# Altium PCB Peak Detector With Banking.PcbDoc (part 5 of 5)
Units mil, origin at the board's own origin, x right, y up, seen from the top; angles counter-clockwise.
Board outline 3330 x 2725 mil, 4 copper layers (TopLayer, GROUND, MidLayer1, BottomLayer); 549 components, 391 nets, 1594 pads, 460 vias.
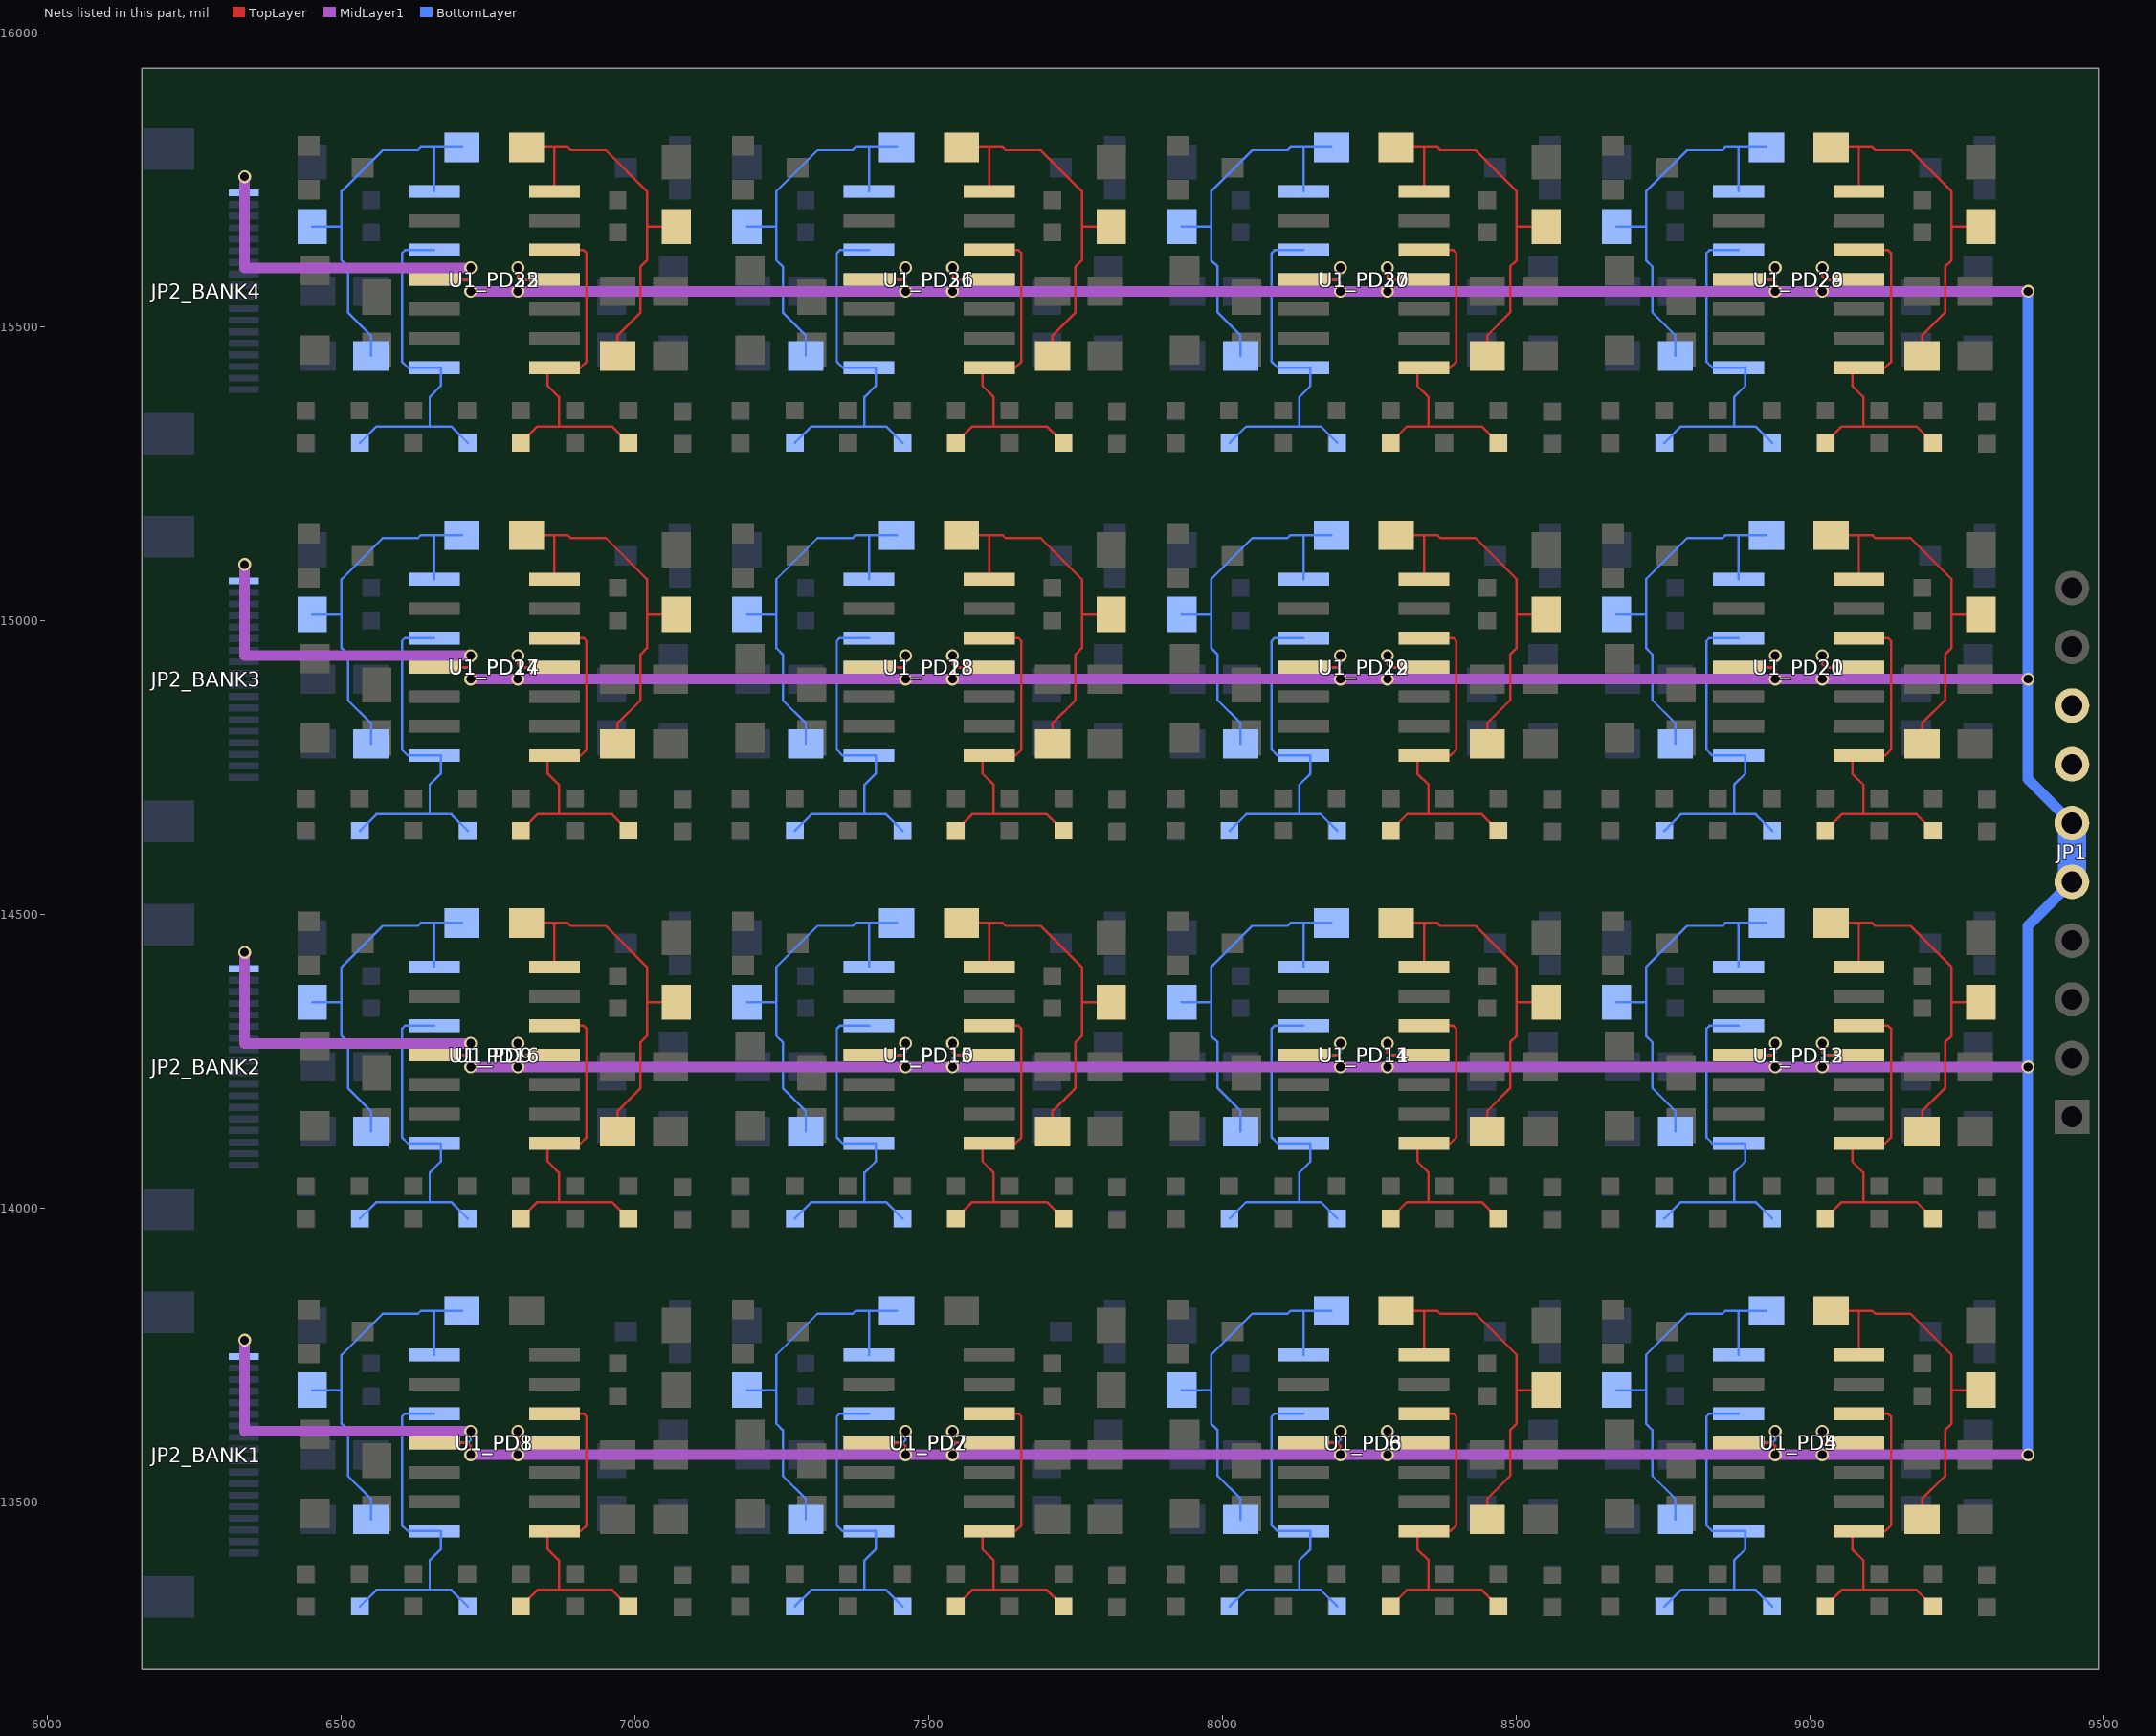
[diagram p7: the nets of this part, all layers, seen from the top]

## Via types
v1: diameter 22, hole 15, TopLayer to BottomLayer, 432 vias
v2: diameter 22, hole 16, TopLayer to BottomLayer, 28 vias

## Nets (pads, with @x,y where several pads share a name; then routed paths per layer and width w, separated by ;. In a path a pad name is that pad's centre, name@x,y a point inside that pad or via, vN(x,y) a via of type N, cw(c..) or ccw(c..) an arc to the next point about the centre after c; other vN are vias at no path point) (continued)
S_DIODE_PD3: C4_PD3.2 D1_PD3.1 D2_PD3.2 U1_PD3.7 | length 661.7
  TopLayer w4: D1_PD3.1@8295.01,13825 8342.35,13825 ; U1_PD3.7@8342.35,13750 8342.35,13825 ; C4_PD3.2@8449.99,13470 8449.99,13504.99 8489,13544 8489,13622 8500,13633 8500,13690 ; D2_PD3.2@8550,13690.01 8500.01,13690.01 ; 8342.35,13825 8365,13825 8370,13820 8430,13820 8500,13750 8500,13690.02
S_DIODE_PD4: C4_PD4.2 D1_PD4.1 D2_PD4.2 U1_PD4.7 | length 661.7
  TopLayer w4: D1_PD4.1@9035.01,13825 9082.35,13825 ; U1_PD4.7@9082.35,13750 9082.35,13825 ; C4_PD4.2@9189.99,13470 9189.99,13504.99 9229,13544 9229,13622 9240,13633 9240,13690 ; D2_PD4.2@9290,13690.01 9240.01,13690.01 ; 9082.35,13825 9105,13825 9110,13820 9170,13820 9240,13750 9240,13690.02
S_DIODE_PD5: C4_PD5.2 D1_PD5.1 D2_PD5.2 U1_PD5.7 | length 661.7
  BottomLayer w4: D2_PD5.2@8670,13690.01 8719.99,13690.01 ; C4_PD5.2@8770.01,13470 8770.01,13504.99 8731,13544 8731,13622 8720,13633 8720,13690 ; U1_PD5.7@8877.65,13750 8877.65,13825 ; D1_PD5.1@8924.99,13825 8877.65,13825 ; 8720,13690.02 8720,13750 8790,13820 8850,13820 8855,13825 8877.65,13825
S_DIODE_PD6: C4_PD6.2 D1_PD6.1 D2_PD6.2 U1_PD6.7 | length 661.7
  BottomLayer w4: D2_PD6.2@7930,13690.01 7979.99,13690.01 ; C4_PD6.2@8030.01,13470 8030.01,13504.99 7991,13544 7991,13622 7980,13633 7980,13690 ; U1_PD6.7@8137.65,13750 8137.65,13825 ; D1_PD6.1@8184.99,13825 8137.65,13825 ; 7980,13690.02 7980,13750 8050,13820 8110,13820 8115,13825 8137.65,13825
S_DIODE_PD7: C4_PD7.2 D1_PD7.1 D2_PD7.2 U1_PD7.7 | length 661.7
  BottomLayer w4: D2_PD7.2@7190,13690.01 7239.99,13690.01 ; C4_PD7.2@7290.01,13470 7290.01,13504.99 7251,13544 7251,13622 7240,13633 7240,13690 ; U1_PD7.7@7397.65,13750 7397.65,13825 ; D1_PD7.1@7444.99,13825 7397.65,13825 ; 7240,13690.02 7240,13750 7310,13820 7370,13820 7375,13825 7397.65,13825
S_DIODE_PD8: C4_PD8.2 D1_PD8.1 D2_PD8.2 U1_PD8.7 | length 661.7
  BottomLayer w4: D2_PD8.2@6450,13690.01 6499.99,13690.01 ; C4_PD8.2@6550.01,13470 6550.01,13504.99 6511,13544 6511,13622 6500,13633 6500,13690 ; U1_PD8.7@6657.65,13750 6657.65,13825 ; D1_PD8.1@6704.99,13825 6657.65,13825 ; 6500,13690.02 6500,13750 6570,13820 6630,13820 6635,13825 6657.65,13825
S_DIODE_PD9: C4_PD9.2 D1_PD9.1 D2_PD9.2 U1_PD9.7 | length 661.7
  TopLayer w4: D1_PD9.1@6815.01,14485 6862.35,14485 ; U1_PD9.7@6862.35,14410 6862.35,14485 ; C4_PD9.2@6969.99,14130 6969.99,14164.99 7009,14204 7009,14282 7020,14293 7020,14350 ; D2_PD9.2@7070,14350.01 7020.01,14350.01 ; 6862.35,14485 6885,14485 6890,14480 6950,14480 7020,14410 7020,14350.02
S_DIODE_PD10: C4_PD10.2 D1_PD10.1 D2_PD10.2 U1_PD10.7 | length 661.7
  TopLayer w4: D1_PD10.1@7555.01,14485 7602.35,14485 ; U1_PD10.7@7602.35,14410 7602.35,14485 ; C4_PD10.2@7709.99,14130 7709.99,14164.99 7749,14204 7749,14282 7760,14293 7760,14350 ; D2_PD10.2@7810,14350.01 7760.01,14350.01 ; 7602.35,14485 7625,14485 7630,14480 7690,14480 7760,14410 7760,14350.02
S_DIODE_PD11: C4_PD11.2 D1_PD11.1 D2_PD11.2 U1_PD11.7 | length 661.7
  TopLayer w4: D1_PD11.1@8295.01,14485 8342.35,14485 ; U1_PD11.7@8342.35,14410 8342.35,14485 ; C4_PD11.2@8449.99,14130 8449.99,14164.99 8489,14204 8489,14282 8500,14293 8500,14350 ; D2_PD11.2@8550,14350.01 8500.01,14350.01 ; 8342.35,14485 8365,14485 8370,14480 8430,14480 8500,14410 8500,14350.02
S_DIODE_PD12: C4_PD12.2 D1_PD12.1 D2_PD12.2 U1_PD12.7 | length 661.7
  TopLayer w4: D1_PD12.1@9035.01,14485 9082.35,14485 ; U1_PD12.7@9082.35,14410 9082.35,14485 ; C4_PD12.2@9189.99,14130 9189.99,14164.99 9229,14204 9229,14282 9240,14293 9240,14350 ; D2_PD12.2@9290,14350.01 9240.01,14350.01 ; 9082.35,14485 9105,14485 9110,14480 9170,14480 9240,14410 9240,14350.02
S_DIODE_PD13: C4_PD13.2 D1_PD13.1 D2_PD13.2 U1_PD13.7 | length 661.7
  BottomLayer w4: D2_PD13.2@8670,14350.01 8719.99,14350.01 ; C4_PD13.2@8770.01,14130 8770.01,14164.99 8731,14204 8731,14282 8720,14293 8720,14350 ; U1_PD13.7@8877.65,14410 8877.65,14485 ; D1_PD13.1@8924.99,14485 8877.65,14485 ; 8720,14350.02 8720,14410 8790,14480 8850,14480 8855,14485 8877.65,14485
S_DIODE_PD14: C4_PD14.2 D1_PD14.1 D2_PD14.2 U1_PD14.7 | length 661.7
  BottomLayer w4: D2_PD14.2@7930,14350.01 7979.99,14350.01 ; C4_PD14.2@8030.01,14130 8030.01,14164.99 7991,14204 7991,14282 7980,14293 7980,14350 ; U1_PD14.7@8137.65,14410 8137.65,14485 ; D1_PD14.1@8184.99,14485 8137.65,14485 ; 7980,14350.02 7980,14410 8050,14480 8110,14480 8115,14485 8137.65,14485
S_DIODE_PD15: C4_PD15.2 D1_PD15.1 D2_PD15.2 U1_PD15.7 | length 661.7
  BottomLayer w4: D2_PD15.2@7190,14350.01 7239.99,14350.01 ; C4_PD15.2@7290.01,14130 7290.01,14164.99 7251,14204 7251,14282 7240,14293 7240,14350 ; U1_PD15.7@7397.65,14410 7397.65,14485 ; D1_PD15.1@7444.99,14485 7397.65,14485 ; 7240,14350.02 7240,14410 7310,14480 7370,14480 7375,14485 7397.65,14485
S_DIODE_PD16: C4_PD16.2 D1_PD16.1 D2_PD16.2 U1_PD16.7 | length 661.7
  BottomLayer w4: D2_PD16.2@6450,14350.01 6499.99,14350.01 ; C4_PD16.2@6550.01,14130 6550.01,14164.99 6511,14204 6511,14282 6500,14293 6500,14350 ; U1_PD16.7@6657.65,14410 6657.65,14485 ; D1_PD16.1@6704.99,14485 6657.65,14485 ; 6500,14350.02 6500,14410 6570,14480 6630,14480 6635,14485 6657.65,14485
S_DIODE_PD17: C4_PD17.2 D1_PD17.1 D2_PD17.2 U1_PD17.7 | length 661.7
  TopLayer w4: D1_PD17.1@6815.01,15145 6862.35,15145 ; U1_PD17.7@6862.35,15070 6862.35,15145 ; C4_PD17.2@6969.99,14790 6969.99,14824.99 7009,14864 7009,14942 7020,14953 7020,15010 ; D2_PD17.2@7070,15010.01 7020.01,15010.01 ; 6862.35,15145 6885,15145 6890,15140 6950,15140 7020,15070 7020,15010.02
S_DIODE_PD18: C4_PD18.2 D1_PD18.1 D2_PD18.2 U1_PD18.7 | length 661.7
  TopLayer w4: D1_PD18.1@7555.01,15145 7602.35,15145 ; U1_PD18.7@7602.35,15070 7602.35,15145 ; C4_PD18.2@7709.99,14790 7709.99,14824.99 7749,14864 7749,14942 7760,14953 7760,15010 ; D2_PD18.2@7810,15010.01 7760.01,15010.01 ; 7602.35,15145 7625,15145 7630,15140 7690,15140 7760,15070 7760,15010.02
S_DIODE_PD19: C4_PD19.2 D1_PD19.1 D2_PD19.2 U1_PD19.7 | length 661.7
  TopLayer w4: D1_PD19.1@8295.01,15145 8342.35,15145 ; U1_PD19.7@8342.35,15070 8342.35,15145 ; C4_PD19.2@8449.99,14790 8449.99,14824.99 8489,14864 8489,14942 8500,14953 8500,15010 ; D2_PD19.2@8550,15010.01 8500.01,15010.01 ; 8342.35,15145 8365,15145 8370,15140 8430,15140 8500,15070 8500,15010.02
S_DIODE_PD20: C4_PD20.2 D1_PD20.1 D2_PD20.2 U1_PD20.7 | length 661.7
  TopLayer w4: D1_PD20.1@9035.01,15145 9082.35,15145 ; U1_PD20.7@9082.35,15070 9082.35,15145 ; C4_PD20.2@9189.99,14790 9189.99,14824.99 9229,14864 9229,14942 9240,14953 9240,15010 ; D2_PD20.2@9290,15010.01 9240.01,15010.01 ; 9082.35,15145 9105,15145 9110,15140 9170,15140 9240,15070 9240,15010.02
S_DIODE_PD21: C4_PD21.2 D1_PD21.1 D2_PD21.2 U1_PD21.7 | length 661.7
  BottomLayer w4: D2_PD21.2@8670,15010.01 8719.99,15010.01 ; C4_PD21.2@8770.01,14790 8770.01,14824.99 8731,14864 8731,14942 8720,14953 8720,15010 ; U1_PD21.7@8877.65,15070 8877.65,15145 ; D1_PD21.1@8924.99,15145 8877.65,15145 ; 8720,15010.02 8720,15070 8790,15140 8850,15140 8855,15145 8877.65,15145
S_DIODE_PD22: C4_PD22.2 D1_PD22.1 D2_PD22.2 U1_PD22.7 | length 661.7
  BottomLayer w4: D2_PD22.2@7930,15010.01 7979.99,15010.01 ; C4_PD22.2@8030.01,14790 8030.01,14824.99 7991,14864 7991,14942 7980,14953 7980,15010 ; U1_PD22.7@8137.65,15070 8137.65,15145 ; D1_PD22.1@8184.99,15145 8137.65,15145 ; 7980,15010.02 7980,15070 8050,15140 8110,15140 8115,15145 8137.65,15145
S_DIODE_PD23: C4_PD23.2 D1_PD23.1 D2_PD23.2 U1_PD23.7 | length 661.7
  BottomLayer w4: D2_PD23.2@7190,15010.01 7239.99,15010.01 ; C4_PD23.2@7290.01,14790 7290.01,14824.99 7251,14864 7251,14942 7240,14953 7240,15010 ; U1_PD23.7@7397.65,15070 7397.65,15145 ; D1_PD23.1@7444.99,15145 7397.65,15145 ; 7240,15010.02 7240,15070 7310,15140 7370,15140 7375,15145 7397.65,15145
S_DIODE_PD24: C4_PD24.2 D1_PD24.1 D2_PD24.2 U1_PD24.7 | length 661.7
  BottomLayer w4: D2_PD24.2@6450,15010.01 6499.99,15010.01 ; C4_PD24.2@6550.01,14790 6550.01,14824.99 6511,14864 6511,14942 6500,14953 6500,15010 ; U1_PD24.7@6657.65,15070 6657.65,15145 ; D1_PD24.1@6704.99,15145 6657.65,15145 ; 6500,15010.02 6500,15070 6570,15140 6630,15140 6635,15145 6657.65,15145
S_DIODE_PD25: C4_PD25.2 D1_PD25.1 D2_PD25.2 U1_PD25.7 | length 661.7
  TopLayer w4: D1_PD25.1@6815.01,15805 6862.35,15805 ; U1_PD25.7@6862.35,15730 6862.35,15805 ; C4_PD25.2@6969.99,15450 6969.99,15484.99 7009,15524 7009,15602 7020,15613 7020,15670 ; D2_PD25.2@7070,15670.01 7020.01,15670.01 ; 6862.35,15805 6885,15805 6890,15800 6950,15800 7020,15730 7020,15670.02
S_DIODE_PD26: C4_PD26.2 D1_PD26.1 D2_PD26.2 U1_PD26.7 | length 661.7
  TopLayer w4: D1_PD26.1@7555.01,15805 7602.35,15805 ; U1_PD26.7@7602.35,15730 7602.35,15805 ; C4_PD26.2@7709.99,15450 7709.99,15484.99 7749,15524 7749,15602 7760,15613 7760,15670 ; D2_PD26.2@7810,15670.01 7760.01,15670.01 ; 7602.35,15805 7625,15805 7630,15800 7690,15800 7760,15730 7760,15670.02
S_DIODE_PD27: C4_PD27.2 D1_PD27.1 D2_PD27.2 U1_PD27.7 | length 661.7
  TopLayer w4: D1_PD27.1@8295.01,15805 8342.35,15805 ; U1_PD27.7@8342.35,15730 8342.35,15805 ; C4_PD27.2@8449.99,15450 8449.99,15484.99 8489,15524 8489,15602 8500,15613 8500,15670 ; D2_PD27.2@8550,15670.01 8500.01,15670.01 ; 8342.35,15805 8365,15805 8370,15800 8430,15800 8500,15730 8500,15670.02
S_DIODE_PD28: C4_PD28.2 D1_PD28.1 D2_PD28.2 U1_PD28.7 | length 661.7
  TopLayer w4: D1_PD28.1@9035.01,15805 9082.35,15805 ; U1_PD28.7@9082.35,15730 9082.35,15805 ; C4_PD28.2@9189.99,15450 9189.99,15484.99 9229,15524 9229,15602 9240,15613 9240,15670 ; D2_PD28.2@9290,15670.01 9240.01,15670.01 ; 9082.35,15805 9105,15805 9110,15800 9170,15800 9240,15730 9240,15670.02
S_DIODE_PD29: C4_PD29.2 D1_PD29.1 D2_PD29.2 U1_PD29.7 | length 661.7
  BottomLayer w4: D2_PD29.2@8670,15670.01 8719.99,15670.01 ; C4_PD29.2@8770.01,15450 8770.01,15484.99 8731,15524 8731,15602 8720,15613 8720,15670 ; U1_PD29.7@8877.65,15730 8877.65,15805 ; D1_PD29.1@8924.99,15805 8877.65,15805 ; 8720,15670.02 8720,15730 8790,15800 8850,15800 8855,15805 8877.65,15805
S_DIODE_PD30: C4_PD30.2 D1_PD30.1 D2_PD30.2 U1_PD30.7 | length 661.7
  BottomLayer w4: D2_PD30.2@7930,15670.01 7979.99,15670.01 ; C4_PD30.2@8030.01,15450 8030.01,15484.99 7991,15524 7991,15602 7980,15613 7980,15670 ; U1_PD30.7@8137.65,15730 8137.65,15805 ; D1_PD30.1@8184.99,15805 8137.65,15805 ; 7980,15670.02 7980,15730 8050,15800 8110,15800 8115,15805 8137.65,15805
S_DIODE_PD31: C4_PD31.2 D1_PD31.1 D2_PD31.2 U1_PD31.7 | length 661.7
  BottomLayer w4: D2_PD31.2@7190,15670.01 7239.99,15670.01 ; C4_PD31.2@7290.01,15450 7290.01,15484.99 7251,15524 7251,15602 7240,15613 7240,15670 ; U1_PD31.7@7397.65,15730 7397.65,15805 ; D1_PD31.1@7444.99,15805 7397.65,15805 ; 7240,15670.02 7240,15730 7310,15800 7370,15800 7375,15805 7397.65,15805
S_DIODE_PD32: C4_PD32.2 D1_PD32.1 D2_PD32.2 U1_PD32.7 | length 661.7
  BottomLayer w4: D2_PD32.2@6450,15670.01 6499.99,15670.01 ; C4_PD32.2@6550.01,15450 6550.01,15484.99 6511,15524 6511,15602 6500,15613 6500,15670 ; U1_PD32.7@6657.65,15730 6657.65,15805 ; D1_PD32.1@6704.99,15805 6657.65,15805 ; 6500,15670.02 6500,15730 6570,15800 6630,15800 6635,15805 6657.65,15805
TRACKING_PD1: R6_PD1.1 RPOT_PD1.2 U1_PD1.1 U1_PD1.5 | length 625.1
  TopLayer w4: RPOT_PD1.2@6805.29,13321.99 6833.3,13350 6850,13350 ; 6851,13350 6870,13350 ; U1_PD1.5@6862.35,13650 6912,13650 6917,13645 6917,13460 6907,13450 U1_PD1.1@6862.35,13450 6851,13450 6851,13419 6870,13400 6870,13350 ; R6_PD1.1@6988.43,13322 6960.43,13350 6870,13350
TRACKING_PD2: R6_PD2.1 RPOT_PD2.2 U1_PD2.1 U1_PD2.5 | length 625.1
  TopLayer w4: RPOT_PD2.2@7545.29,13321.99 7573.3,13350 7590,13350 ; 7591,13350 7610,13350 ; U1_PD2.5@7602.35,13650 7652,13650 7657,13645 7657,13460 7647,13450 U1_PD2.1@7602.35,13450 7591,13450 7591,13419 7610,13400 7610,13350 ; R6_PD2.1@7728.43,13322 7700.43,13350 7610,13350
TRACKING_PD3: R6_PD3.1 RPOT_PD3.2 U1_PD3.1 U1_PD3.5 | length 625.1
  TopLayer w4: RPOT_PD3.2@8285.29,13321.99 8313.3,13350 8330,13350 ; 8331,13350 8350,13350 ; U1_PD3.5@8342.35,13650 8392,13650 8397,13645 8397,13460 8387,13450 U1_PD3.1@8342.35,13450 8331,13450 8331,13419 8350,13400 8350,13350 ; R6_PD3.1@8468.43,13322 8440.43,13350 8350,13350
TRACKING_PD4: R6_PD4.1 RPOT_PD4.2 U1_PD4.1 U1_PD4.5 | length 625.1
  TopLayer w4: RPOT_PD4.2@9025.29,13321.99 9053.3,13350 9070,13350 ; 9071,13350 9090,13350 ; U1_PD4.5@9082.35,13650 9132,13650 9137,13645 9137,13460 9127,13450 U1_PD4.1@9082.35,13450 9071,13450 9071,13419 9090,13400 9090,13350 ; R6_PD4.1@9208.43,13322 9180.43,13350 9090,13350
TRACKING_PD5: R6_PD5.1 RPOT_PD5.2 U1_PD5.1 U1_PD5.5 | length 625.1
  BottomLayer w4: R6_PD5.1@8751.57,13322 8779.57,13350 8870,13350 ; U1_PD5.5@8877.65,13650 8828,13650 8823,13645 8823,13460 8833,13450 U1_PD5.1@8877.65,13450 8889,13450 8889,13419 8870,13400 8870,13350 ; 8889,13350 8870,13350 ; 8890,13350 8906.7,13350 RPOT_PD5.2@8934.71,13321.99
TRACKING_PD6: R6_PD6.1 RPOT_PD6.2 U1_PD6.1 U1_PD6.5 | length 625.1
  BottomLayer w4: R6_PD6.1@8011.57,13322 8039.57,13350 8130,13350 ; U1_PD6.5@8137.65,13650 8088,13650 8083,13645 8083,13460 8093,13450 U1_PD6.1@8137.65,13450 8149,13450 8149,13419 8130,13400 8130,13350 ; 8149,13350 8130,13350 ; 8150,13350 8166.7,13350 RPOT_PD6.2@8194.71,13321.99
TRACKING_PD7: R6_PD7.1 RPOT_PD7.2 U1_PD7.1 U1_PD7.5 | length 625.1
  BottomLayer w4: R6_PD7.1@7271.57,13322 7299.57,13350 7390,13350 ; U1_PD7.5@7397.65,13650 7348,13650 7343,13645 7343,13460 7353,13450 U1_PD7.1@7397.65,13450 7409,13450 7409,13419 7390,13400 7390,13350 ; 7409,13350 7390,13350 ; 7410,13350 7426.7,13350 RPOT_PD7.2@7454.71,13321.99
TRACKING_PD8: R6_PD8.1 RPOT_PD8.2 U1_PD8.1 U1_PD8.5 | length 625.1
  BottomLayer w4: R6_PD8.1@6531.57,13322 6559.57,13350 6650,13350 ; U1_PD8.5@6657.65,13650 6608,13650 6603,13645 6603,13460 6613,13450 U1_PD8.1@6657.65,13450 6669,13450 6669,13419 6650,13400 6650,13350 ; 6669,13350 6650,13350 ; 6670,13350 6686.7,13350 RPOT_PD8.2@6714.71,13321.99
TRACKING_PD9: R6_PD9.1 RPOT_PD9.2 U1_PD9.1 U1_PD9.5 | length 625.1
  TopLayer w4: RPOT_PD9.2@6805.29,13981.99 6833.3,14010 6850,14010 ; 6851,14010 6870,14010 ; U1_PD9.5@6862.35,14310 6912,14310 6917,14305 6917,14120 6907,14110 U1_PD9.1@6862.35,14110 6851,14110 6851,14079 6870,14060 6870,14010 ; R6_PD9.1@6988.43,13982 6960.43,14010 6870,14010
TRACKING_PD10: R6_PD10.1 RPOT_PD10.2 U1_PD10.1 U1_PD10.5 | length 625.1
  TopLayer w4: RPOT_PD10.2@7545.29,13981.99 7573.3,14010 7590,14010 ; 7591,14010 7610,14010 ; U1_PD10.5@7602.35,14310 7652,14310 7657,14305 7657,14120 7647,14110 U1_PD10.1@7602.35,14110 7591,14110 7591,14079 7610,14060 7610,14010 ; R6_PD10.1@7728.43,13982 7700.43,14010 7610,14010
TRACKING_PD11: R6_PD11.1 RPOT_PD11.2 U1_PD11.1 U1_PD11.5 | length 625.1
  TopLayer w4: RPOT_PD11.2@8285.29,13981.99 8313.3,14010 8330,14010 ; 8331,14010 8350,14010 ; U1_PD11.5@8342.35,14310 8392,14310 8397,14305 8397,14120 8387,14110 U1_PD11.1@8342.35,14110 8331,14110 8331,14079 8350,14060 8350,14010 ; R6_PD11.1@8468.43,13982 8440.43,14010 8350,14010
TRACKING_PD12: R6_PD12.1 RPOT_PD12.2 U1_PD12.1 U1_PD12.5 | length 625.1
  TopLayer w4: RPOT_PD12.2@9025.29,13981.99 9053.3,14010 9070,14010 ; 9071,14010 9090,14010 ; U1_PD12.5@9082.35,14310 9132,14310 9137,14305 9137,14120 9127,14110 U1_PD12.1@9082.35,14110 9071,14110 9071,14079 9090,14060 9090,14010 ; R6_PD12.1@9208.43,13982 9180.43,14010 9090,14010
TRACKING_PD13: R6_PD13.1 RPOT_PD13.2 U1_PD13.1 U1_PD13.5 | length 625.1
  BottomLayer w4: R6_PD13.1@8751.57,13982 8779.57,14010 8870,14010 ; U1_PD13.5@8877.65,14310 8828,14310 8823,14305 8823,14120 8833,14110 U1_PD13.1@8877.65,14110 8889,14110 8889,14079 8870,14060 8870,14010 ; 8889,14010 8870,14010 ; 8890,14010 8906.7,14010 RPOT_PD13.2@8934.71,13981.99
TRACKING_PD14: R6_PD14.1 RPOT_PD14.2 U1_PD14.1 U1_PD14.5 | length 625.1
  BottomLayer w4: R6_PD14.1@8011.57,13982 8039.57,14010 8130,14010 ; U1_PD14.5@8137.65,14310 8088,14310 8083,14305 8083,14120 8093,14110 U1_PD14.1@8137.65,14110 8149,14110 8149,14079 8130,14060 8130,14010 ; 8149,14010 8130,14010 ; 8150,14010 8166.7,14010 RPOT_PD14.2@8194.71,13981.99
TRACKING_PD15: R6_PD15.1 RPOT_PD15.2 U1_PD15.1 U1_PD15.5 | length 625.1
  BottomLayer w4: R6_PD15.1@7271.57,13982 7299.57,14010 7390,14010 ; U1_PD15.5@7397.65,14310 7348,14310 7343,14305 7343,14120 7353,14110 U1_PD15.1@7397.65,14110 7409,14110 7409,14079 7390,14060 7390,14010 ; 7409,14010 7390,14010 ; 7410,14010 7426.7,14010 RPOT_PD15.2@7454.71,13981.99
TRACKING_PD16: R6_PD16.1 RPOT_PD16.2 U1_PD16.1 U1_PD16.5 | length 625.1
  BottomLayer w4: R6_PD16.1@6531.57,13982 6559.57,14010 6650,14010 ; U1_PD16.5@6657.65,14310 6608,14310 6603,14305 6603,14120 6613,14110 U1_PD16.1@6657.65,14110 6669,14110 6669,14079 6650,14060 6650,14010 ; 6669,14010 6650,14010 ; 6670,14010 6686.7,14010 RPOT_PD16.2@6714.71,13981.99
TRACKING_PD17: R6_PD17.1 RPOT_PD17.2 U1_PD17.1 U1_PD17.5 | length 625.1
  TopLayer w4: RPOT_PD17.2@6805.29,14641.99 6833.3,14670 6850,14670 ; 6851,14670 6870,14670 ; U1_PD17.5@6862.35,14970 6912,14970 6917,14965 6917,14780 6907,14770 U1_PD17.1@6862.35,14770 6851,14770 6851,14739 6870,14720 6870,14670 ; R6_PD17.1@6988.43,14642 6960.43,14670 6870,14670
TRACKING_PD18: R6_PD18.1 RPOT_PD18.2 U1_PD18.1 U1_PD18.5 | length 625.1
  TopLayer w4: RPOT_PD18.2@7545.29,14641.99 7573.3,14670 7590,14670 ; 7591,14670 7610,14670 ; U1_PD18.5@7602.35,14970 7652,14970 7657,14965 7657,14780 7647,14770 U1_PD18.1@7602.35,14770 7591,14770 7591,14739 7610,14720 7610,14670 ; R6_PD18.1@7728.43,14642 7700.43,14670 7610,14670
TRACKING_PD19: R6_PD19.1 RPOT_PD19.2 U1_PD19.1 U1_PD19.5 | length 625.1
  TopLayer w4: RPOT_PD19.2@8285.29,14641.99 8313.3,14670 8330,14670 ; 8331,14670 8350,14670 ; U1_PD19.5@8342.35,14970 8392,14970 8397,14965 8397,14780 8387,14770 U1_PD19.1@8342.35,14770 8331,14770 8331,14739 8350,14720 8350,14670 ; R6_PD19.1@8468.43,14642 8440.43,14670 8350,14670
TRACKING_PD20: R6_PD20.1 RPOT_PD20.2 U1_PD20.1 U1_PD20.5 | length 625.1
  TopLayer w4: RPOT_PD20.2@9025.29,14641.99 9053.3,14670 9070,14670 ; 9071,14670 9090,14670 ; U1_PD20.5@9082.35,14970 9132,14970 9137,14965 9137,14780 9127,14770 U1_PD20.1@9082.35,14770 9071,14770 9071,14739 9090,14720 9090,14670 ; R6_PD20.1@9208.43,14642 9180.43,14670 9090,14670
TRACKING_PD21: R6_PD21.1 RPOT_PD21.2 U1_PD21.1 U1_PD21.5 | length 625.1
  BottomLayer w4: R6_PD21.1@8751.57,14642 8779.57,14670 8870,14670 ; U1_PD21.5@8877.65,14970 8828,14970 8823,14965 8823,14780 8833,14770 U1_PD21.1@8877.65,14770 8889,14770 8889,14739 8870,14720 8870,14670 ; 8889,14670 8870,14670 ; 8890,14670 8906.7,14670 RPOT_PD21.2@8934.71,14641.99
TRACKING_PD22: R6_PD22.1 RPOT_PD22.2 U1_PD22.1 U1_PD22.5 | length 625.1
  BottomLayer w4: R6_PD22.1@8011.57,14642 8039.57,14670 8130,14670 ; U1_PD22.5@8137.65,14970 8088,14970 8083,14965 8083,14780 8093,14770 U1_PD22.1@8137.65,14770 8149,14770 8149,14739 8130,14720 8130,14670 ; 8149,14670 8130,14670 ; 8150,14670 8166.7,14670 RPOT_PD22.2@8194.71,14641.99
TRACKING_PD23: R6_PD23.1 RPOT_PD23.2 U1_PD23.1 U1_PD23.5 | length 625.1
  BottomLayer w4: R6_PD23.1@7271.57,14642 7299.57,14670 7390,14670 ; U1_PD23.5@7397.65,14970 7348,14970 7343,14965 7343,14780 7353,14770 U1_PD23.1@7397.65,14770 7409,14770 7409,14739 7390,14720 7390,14670 ; 7409,14670 7390,14670 ; 7410,14670 7426.7,14670 RPOT_PD23.2@7454.71,14641.99
TRACKING_PD24: R6_PD24.1 RPOT_PD24.2 U1_PD24.1 U1_PD24.5 | length 625.1
  BottomLayer w4: R6_PD24.1@6531.57,14642 6559.57,14670 6650,14670 ; U1_PD24.5@6657.65,14970 6608,14970 6603,14965 6603,14780 6613,14770 U1_PD24.1@6657.65,14770 6669,14770 6669,14739 6650,14720 6650,14670 ; 6669,14670 6650,14670 ; 6670,14670 6686.7,14670 RPOT_PD24.2@6714.71,14641.99
TRACKING_PD25: R6_PD25.1 RPOT_PD25.2 U1_PD25.1 U1_PD25.5 | length 625.1
  TopLayer w4: RPOT_PD25.2@6805.29,15301.99 6833.3,15330 6850,15330 ; 6851,15330 6870,15330 ; U1_PD25.5@6862.35,15630 6912,15630 6917,15625 6917,15440 6907,15430 U1_PD25.1@6862.35,15430 6851,15430 6851,15399 6870,15380 6870,15330 ; R6_PD25.1@6988.43,15302 6960.43,15330 6870,15330
TRACKING_PD26: R6_PD26.1 RPOT_PD26.2 U1_PD26.1 U1_PD26.5 | length 625.1
  TopLayer w4: RPOT_PD26.2@7545.29,15301.99 7573.3,15330 7590,15330 ; 7591,15330 7610,15330 ; U1_PD26.5@7602.35,15630 7652,15630 7657,15625 7657,15440 7647,15430 U1_PD26.1@7602.35,15430 7591,15430 7591,15399 7610,15380 7610,15330 ; R6_PD26.1@7728.43,15302 7700.43,15330 7610,15330
TRACKING_PD27: R6_PD27.1 RPOT_PD27.2 U1_PD27.1 U1_PD27.5 | length 625.1
  TopLayer w4: RPOT_PD27.2@8285.29,15301.99 8313.3,15330 8330,15330 ; 8331,15330 8350,15330 ; U1_PD27.5@8342.35,15630 8392,15630 8397,15625 8397,15440 8387,15430 U1_PD27.1@8342.35,15430 8331,15430 8331,15399 8350,15380 8350,15330 ; R6_PD27.1@8468.43,15302 8440.43,15330 8350,15330
TRACKING_PD28: R6_PD28.1 RPOT_PD28.2 U1_PD28.1 U1_PD28.5 | length 625.1
  TopLayer w4: RPOT_PD28.2@9025.29,15301.99 9053.3,15330 9070,15330 ; 9071,15330 9090,15330 ; U1_PD28.5@9082.35,15630 9132,15630 9137,15625 9137,15440 9127,15430 U1_PD28.1@9082.35,15430 9071,15430 9071,15399 9090,15380 9090,15330 ; R6_PD28.1@9208.43,15302 9180.43,15330 9090,15330
TRACKING_PD29: R6_PD29.1 RPOT_PD29.2 U1_PD29.1 U1_PD29.5 | length 625.1
  BottomLayer w4: R6_PD29.1@8751.57,15302 8779.57,15330 8870,15330 ; U1_PD29.5@8877.65,15630 8828,15630 8823,15625 8823,15440 8833,15430 U1_PD29.1@8877.65,15430 8889,15430 8889,15399 8870,15380 8870,15330 ; 8889,15330 8870,15330 ; 8890,15330 8906.7,15330 RPOT_PD29.2@8934.71,15301.99
TRACKING_PD30: R6_PD30.1 RPOT_PD30.2 U1_PD30.1 U1_PD30.5 | length 625.1
  BottomLayer w4: R6_PD30.1@8011.57,15302 8039.57,15330 8130,15330 ; U1_PD30.5@8137.65,15630 8088,15630 8083,15625 8083,15440 8093,15430 U1_PD30.1@8137.65,15430 8149,15430 8149,15399 8130,15380 8130,15330 ; 8149,15330 8130,15330 ; 8150,15330 8166.7,15330 RPOT_PD30.2@8194.71,15301.99
TRACKING_PD31: R6_PD31.1 RPOT_PD31.2 U1_PD31.1 U1_PD31.5 | length 625.1
  BottomLayer w4: R6_PD31.1@7271.57,15302 7299.57,15330 7390,15330 ; U1_PD31.5@7397.65,15630 7348,15630 7343,15625 7343,15440 7353,15430 U1_PD31.1@7397.65,15430 7409,15430 7409,15399 7390,15380 7390,15330 ; 7409,15330 7390,15330 ; 7410,15330 7426.7,15330 RPOT_PD31.2@7454.71,15301.99
TRACKING_PD32: R6_PD32.1 RPOT_PD32.2 U1_PD32.1 U1_PD32.5 | length 625.1
  BottomLayer w4: R6_PD32.1@6531.57,15302 6559.57,15330 6650,15330 ; U1_PD32.5@6657.65,15630 6608,15630 6603,15625 6603,15440 6613,15430 U1_PD32.1@6657.65,15430 6669,15430 6669,15399 6650,15380 6650,15330 ; 6669,15330 6650,15330 ; 6670,15330 6686.7,15330 RPOT_PD32.2@6714.71,15301.99
VCC5: JP1.7 JP1.8 JP2_BANK1.18 JP2_BANK2.18 JP2_BANK3.18 JP2_BANK4.18 U1_PD1.4 U1_PD2.4 U1_PD3.4 U1_PD4.4 U1_PD5.4 U1_PD6.4 U1_PD7.4 U1_PD8.4 U1_PD9.4 U1_PD10.4 U1_PD11.4 U1_PD12.4 U1_PD13.4 U1_PD14.4 U1_PD15.4 U1_PD16.4 U1_PD17.4 U1_PD18.4 U1_PD19.4 U1_PD20.4 U1_PD21.4 U1_PD22.4 U1_PD23.4 U1_PD24.4 U1_PD25.4 U1_PD26.4 U1_PD27.4 U1_PD28.4 U1_PD29.4 U1_PD30.4 U1_PD31.4 U1_PD32.4 | length 4812.2
  TopLayer w4: v1(6800,13620) 6800,13605 6805,13600 U1_PD1.4@6862.35,13600 ; v1(6800,14280) 6800,14265 6805,14260 U1_PD9.4@6862.35,14260 ; v1(6800,14940) 6800,14925 6805,14920 U1_PD17.4@6862.35,14920 ; v1(6800,15600) 6800,15585 6805,15580 U1_PD25.4@6862.35,15580 ; v1(7540,13620) 7540,13605 7545,13600 U1_PD2.4@7602.35,13600 ; v1(7540,14280) 7540,14265 7545,14260 U1_PD10.4@7602.35,14260 ; v1(7540,14940) 7540,14925 7545,14920 U1_PD18.4@7602.35,14920 ; v1(7540,15600) 7540,15585 7545,15580 U1_PD26.4@7602.35,15580 ; v1(8280,13620) 8280,13605 8285,13600 U1_PD3.4@8342.35,13600 ; v1(8280,14280) 8280,14265 8285,14260 U1_PD11.4@8342.35,14260 ; v1(8280,14940) 8280,14925 8285,14920 U1_PD19.4@8342.35,14920 ; v1(8280,15600) 8280,15585 8285,15580 U1_PD27.4@8342.35,15580 ; v1(9020,13620) 9020,13605 9025,13600 U1_PD4.4@9082.35,13600 ; v1(9020,14280) 9020,14265 9025,14260 U1_PD12.4@9082.35,14260 ; v1(9020,14940) 9020,14925 9025,14920 U1_PD20.4@9082.35,14920 ; v1(9020,15600) 9020,15585 9025,15580 U1_PD28.4@9082.35,15580
  MidLayer1 w18: v1(6335,13775) 6335,13620 v1(6720,13620) ; v1(6335,14435) 6335,14280 v1(6720,14280) ; v1(6335,15095) 6335,14940 v1(6720,14940) ; v1(6335,15755) 6335,15600 v1(6720,15600)
  BottomLayer w4: U1_PD8.4@6657.65,13600 6715,13600 6720,13605 v1(6720,13620) ; U1_PD16.4@6657.65,14260 6715,14260 6720,14265 v1(6720,14280) ; U1_PD24.4@6657.65,14920 6715,14920 6720,14925 v1(6720,14940) ; U1_PD32.4@6657.65,15580 6715,15580 6720,15585 v1(6720,15600) ; U1_PD7.4@7397.65,13600 7455,13600 7460,13605 v1(7460,13620) ; U1_PD15.4@7397.65,14260 7455,14260 7460,14265 v1(7460,14280) ; U1_PD23.4@7397.65,14920 7455,14920 7460,14925 v1(7460,14940) ; U1_PD31.4@7397.65,15580 7455,15580 7460,15585 v1(7460,15600) ; U1_PD6.4@8137.65,13600 8195,13600 8200,13605 v1(8200,13620) ; U1_PD14.4@8137.65,14260 8195,14260 8200,14265 v1(8200,14280) ; U1_PD22.4@8137.65,14920 8195,14920 8200,14925 v1(8200,14940) ; U1_PD30.4@8137.65,15580 8195,15580 8200,15585 v1(8200,15600) ; U1_PD5.4@8877.65,13600 8935,13600 8940,13605 v1(8940,13620) ; U1_PD13.4@8877.65,14260 8935,14260 8940,14265 v1(8940,14280) ; U1_PD21.4@8877.65,14920 8935,14920 8940,14925 v1(8940,14940) ; U1_PD29.4@8877.65,15580 8935,15580 8940,15585 v1(8940,15600)
  BottomLayer w8: JP2_BANK1.18@6333.98,13747.32 v1@6333.98,13775 ; JP2_BANK2.18@6333.98,14407.32 v1@6333.98,14435 ; JP2_BANK3.18@6333.98,15067.32 v1@6333.98,15095 ; JP2_BANK4.18@6333.98,15727.32 v1@6333.98,15755
VSSM5: JP1.5 JP1.6 U1_PD1.11 U1_PD2.11 U1_PD3.11 U1_PD4.11 U1_PD5.11 U1_PD6.11 U1_PD7.11 U1_PD8.11 U1_PD9.11 U1_PD10.11 U1_PD11.11 U1_PD12.11 U1_PD13.11 U1_PD14.11 U1_PD15.11 U1_PD16.11 U1_PD17.11 U1_PD18.11 U1_PD19.11 U1_PD20.11 U1_PD21.11 U1_PD22.11 U1_PD23.11 U1_PD24.11 U1_PD25.11 U1_PD26.11 U1_PD27.11 U1_PD28.11 U1_PD29.11 U1_PD30.11 U1_PD31.11 U1_PD32.11 | length 15384.4
  TopLayer w4: U1_PD1.11@6657.63,13600 6715,13600 6720,13595 v1(6720,13580) ; U1_PD9.11@6657.63,14260 6715,14260 6720,14255 v1(6720,14240) ; U1_PD17.11@6657.63,14920 6715,14920 6720,14915 v1(6720,14900) ; U1_PD25.11@6657.63,15580 6715,15580 6720,15575 v1(6720,15560) ; U1_PD2.11@7397.63,13600 7455,13600 7460,13595 v1(7460,13580) ; U1_PD10.11@7397.63,14260 7455,14260 7460,14255 v1(7460,14240) ; U1_PD18.11@7397.63,14920 7455,14920 7460,14915 v1(7460,14900) ; U1_PD26.11@7397.63,15580 7455,15580 7460,15575 v1(7460,15560) ; U1_PD3.11@8137.63,13600 8195,13600 8200,13595 v1(8200,13580) ; U1_PD11.11@8137.63,14260 8195,14260 8200,14255 v1(8200,14240) ; U1_PD19.11@8137.63,14920 8195,14920 8200,14915 v1(8200,14900) ; U1_PD27.11@8137.63,15580 8195,15580 8200,15575 v1(8200,15560) ; U1_PD4.11@8877.63,13600 8935,13600 8940,13595 v1(8940,13580) ; U1_PD12.11@8877.63,14260 8935,14260 8940,14255 v1(8940,14240) ; U1_PD20.11@8877.63,14920 8935,14920 8940,14915 v1(8940,14900) ; U1_PD28.11@8877.63,15580 8935,15580 8940,15575 v1(8940,15560)
  MidLayer1 w18: v1(6720,13580) v1(6800,13580) v1(7460,13580) v1(7540,13580) v1(8200,13580) v1(8280,13580) v1(8940,13580) v1(9020,13580) v1(9370,13580) ; v1(6720,14240) v1(6800,14240) v1(7460,14240) v1(7540,14240) v1(8200,14240) v1(8280,14240) v1(8940,14240) v1(9020,14240) v1(9370,14240) ; v1(6720,14900) v1(6800,14900) v1(7460,14900) v1(7540,14900) v1(8200,14900) v1(8280,14900) v1(8940,14900) v1(9020,14900) v1(9370,14900) ; v1(6720,15560) v1(6800,15560) v1(7460,15560) v1(7540,15560) v1(8200,15560) v1(8280,15560) v1(8940,15560) v1(9020,15560) v1(9370,15560)
  BottomLayer w4: v1(6800,13580) 6800,13595 6805,13600 U1_PD8.11@6862.37,13600 ; v1(6800,14240) 6800,14255 6805,14260 U1_PD16.11@6862.37,14260 ; v1(6800,14900) 6800,14915 6805,14920 U1_PD24.11@6862.37,14920 ; v1(6800,15560) 6800,15575 6805,15580 U1_PD32.11@6862.37,15580 ; v1(7540,13580) 7540,13595 7545,13600 U1_PD7.11@7602.37,13600 ; v1(7540,14240) 7540,14255 7545,14260 U1_PD15.11@7602.37,14260 ; v1(7540,14900) 7540,14915 7545,14920 U1_PD23.11@7602.37,14920 ; v1(7540,15560) 7540,15575 7545,15580 U1_PD31.11@7602.37,15580 ; v1(8280,13580) 8280,13595 8285,13600 U1_PD6.11@8342.37,13600 ; v1(8280,14240) 8280,14255 8285,14260 U1_PD14.11@8342.37,14260 ; v1(8280,14900) 8280,14915 8285,14920 U1_PD22.11@8342.37,14920 ; v1(8280,15560) 8280,15575 8285,15580 U1_PD30.11@8342.37,15580 ; v1(9020,13580) 9020,13595 9025,13600 U1_PD5.11@9082.37,13600 ; v1(9020,14240) 9020,14255 9025,14260 U1_PD13.11@9082.37,14260 ; v1(9020,14900) 9020,14915 9025,14920 U1_PD21.11@9082.37,14920 ; v1(9020,15560) 9020,15575 9025,15580 U1_PD29.11@9082.37,15580
  BottomLayer w18: v1(9370,13580) v1(9370,14240) 9370,14480 JP1.5@9445,14555 JP1.6@9445,14655 9370,14730 v1(9370,14900) v1@9370,15555 ; JP1.6@9430,14655 9430,14555 JP1.5@9435,14555 ; JP1.5@9460,14555 JP1.6@9460,14655
pads on no net: JP2_BANK1.19 JP2_BANK1.20 JP2_BANK2.19 JP2_BANK2.20 JP2_BANK3.19 JP2_BANK3.20 JP2_BANK4.19 JP2_BANK4.20 U1_PD1.12 U1_PD1.13 U1_PD1.14 U1_PD2.12 U1_PD2.13 U1_PD2.14 U1_PD3.12 U1_PD3.13 U1_PD3.14 U1_PD4.12 U1_PD4.13 U1_PD4.14 U1_PD5.12 U1_PD5.13 U1_PD5.14 U1_PD6.12 U1_PD6.13 U1_PD6.14 U1_PD7.12 U1_PD7.13 U1_PD7.14 U1_PD8.12 U1_PD8.13 U1_PD8.14 U1_PD9.12 U1_PD9.13 U1_PD9.14 U1_PD10.12 U1_PD10.13 U1_PD10.14 U1_PD11.12 U1_PD11.13 U1_PD11.14 U1_PD12.12 U1_PD12.13 U1_PD12.14 U1_PD13.12 U1_PD13.13 U1_PD13.14 U1_PD14.12 U1_PD14.13 U1_PD14.14 U1_PD15.12 U1_PD15.13 U1_PD15.14 U1_PD16.12 U1_PD16.13 U1_PD16.14 U1_PD17.12 U1_PD17.13 U1_PD17.14 U1_PD18.12 U1_PD18.13 U1_PD18.14 U1_PD19.12 U1_PD19.13 U1_PD19.14 U1_PD20.12 U1_PD20.13 U1_PD20.14 U1_PD21.12 U1_PD21.13 U1_PD21.14 U1_PD22.12 U1_PD22.13 U1_PD22.14 U1_PD23.12 U1_PD23.13 U1_PD23.14 U1_PD24.12 U1_PD24.13 U1_PD24.14 U1_PD25.12 U1_PD25.13 U1_PD25.14 U1_PD26.12 U1_PD26.13 U1_PD26.14 U1_PD27.12 U1_PD27.13 U1_PD27.14 U1_PD28.12 U1_PD28.13 U1_PD28.14 U1_PD29.12 U1_PD29.13 U1_PD29.14 U1_PD30.12 U1_PD30.13 U1_PD30.14 U1_PD31.12 U1_PD31.13 U1_PD31.14 U1_PD32.12 U1_PD32.13 U1_PD32.14

## Polygon pours and split planes (outlines as drawn)
GND on GROUND (split plane): 9474.93,14915.1 9405.1,14915.1 9405.1,15650 9404.71,15651.95 9403.6,15653.6 9401.95,15654.71 9400,15655.1 6690,15655.1 6688.05,15654.71 6686.4,15653.6 6685.29,15651.95 6684.9,15650 6684.9,15580 6685.29,15578.05 6686.4,15576.4 6688.05,15575.29 6690,15574.9 9304.9,15574.9 9304.9,14995.1 6690,14995.1 6688.05,14994.71 6686.4,14993.6 6685.29,14991.95 6684.9,14990 6684.9,14920 6685.29,14918.05 6686.4,14916.4 6688.05,14915.29 6690,14914.9 9304.9,14914.9 9304.9,14335.1 6690,14335.1 6688.05,14334.71 6686.4,14333.6 6685.29,14331.95 6684.9,14330 6684.9,14260 6685.29,14258.05 6686.4,14256.4 6688.05,14255.29 6690,14254.9 9304.9,14254.9 9304.9,13675.1 6690,13675.1 6688.05,13674.71 6686.4,13673.6 6685.29,13671.95 6684.9,13670 6684.9,13600 6685.29,13598.05 6686.4,13596.4 6688.05,13595.29 6690,13594.9 9400,13594.9 9401.95,13595.29 9403.6,13596.4 9404.71,13598.05 9405.1,13600 9405.1,14699.9 9474.93,14699.9 9474.93,13230.07 6175.07,13230.07 6175.07,15924.93 9474.93,15924.93
VCC5 on GROUND (split plane): 9394.9,14910 9395.29,14908.05 9396.4,14906.4 9398.05,14905.29 9400,14904.9 9474.93,14904.9 9474.93,14710.1 9400,14710.1 9398.05,14709.71 9396.4,14708.6 9395.29,14706.95 9394.9,14705 9394.9,13605.1 6695.1,13605.1 6695.1,13664.9 9310,13664.9 9311.95,13665.29 9313.6,13666.4 9314.71,13668.05 9315.1,13670 9315.1,14260 9314.71,14261.95 9313.6,14263.6 9311.95,14264.71 9310,14265.1 6695.1,14265.1 6695.1,14324.9 9310,14324.9 9311.95,14325.29 9313.6,14326.4 9314.71,14328.05 9315.1,14330 9315.1,14920 9314.71,14921.95 9313.6,14923.6 9311.95,14924.71 9310,14925.1 6695.1,14925.1 6695.1,14984.9 9310,14984.9 9311.95,14985.29 9313.6,14986.4 9314.71,14988.05 9315.1,14990 9315.1,15580 9314.71,15581.95 9313.6,15583.6 9311.95,15584.71 9310,15585.1 6695.1,15585.1 6695.1,15644.9 9394.9,15644.9

## Keep-outs
KeepOutLayer:
  lines w10: 6155,13210 6155,15945 9495,15945 9495,13210 6156,13210

## Other copper
GROUND (plane layer: these items are gaps in the copper):
  lines w10: 9505,14705 9400,14705 9400,13600 6690,13600 6690,13670 9310,13670 9310,14260 6690,14260 6690,14330 9310,14330 9310,14920 6690,14920 6690,14990 9310,14990 9310,15580 6690,15580 6690,15650 9400,15650 9400,14910 9505,14910

## Silkscreen, mask and mechanical layers (free items; w line width, h text height)
Mechanical4:
  lines w10: 6155,13210 6155,15945 9495,15945 9495,13210 6155,13210

## Dimensions
6155,13210 to 6155,15945 on Mechanical1
6155,13210 to 9495,13210 on KeepOutLayer

## Text inside footprints (layer, text, board x,y; h text height)
JP2_BANK1: BottomOverlay "18" at 6433.39,13791.61 h59.06 r90; BottomOverlay "1" at 6433.39,13422.52 h59.06 r90
JP2_BANK2: BottomOverlay "18" at 6433.39,14451.61 h59.06 r90; BottomOverlay "1" at 6433.39,14082.52 h59.06 r90
JP2_BANK3: BottomOverlay "18" at 6433.39,15111.61 h59.06 r90; BottomOverlay "1" at 6433.39,14742.52 h59.06 r90
JP2_BANK4: BottomOverlay "1" at 6433.39,15402.52 h59.06 r90; BottomOverlay "18" at 6433.39,15771.61 h59.06 r90